# EAGLE board main (EAGLE 9.6.2)
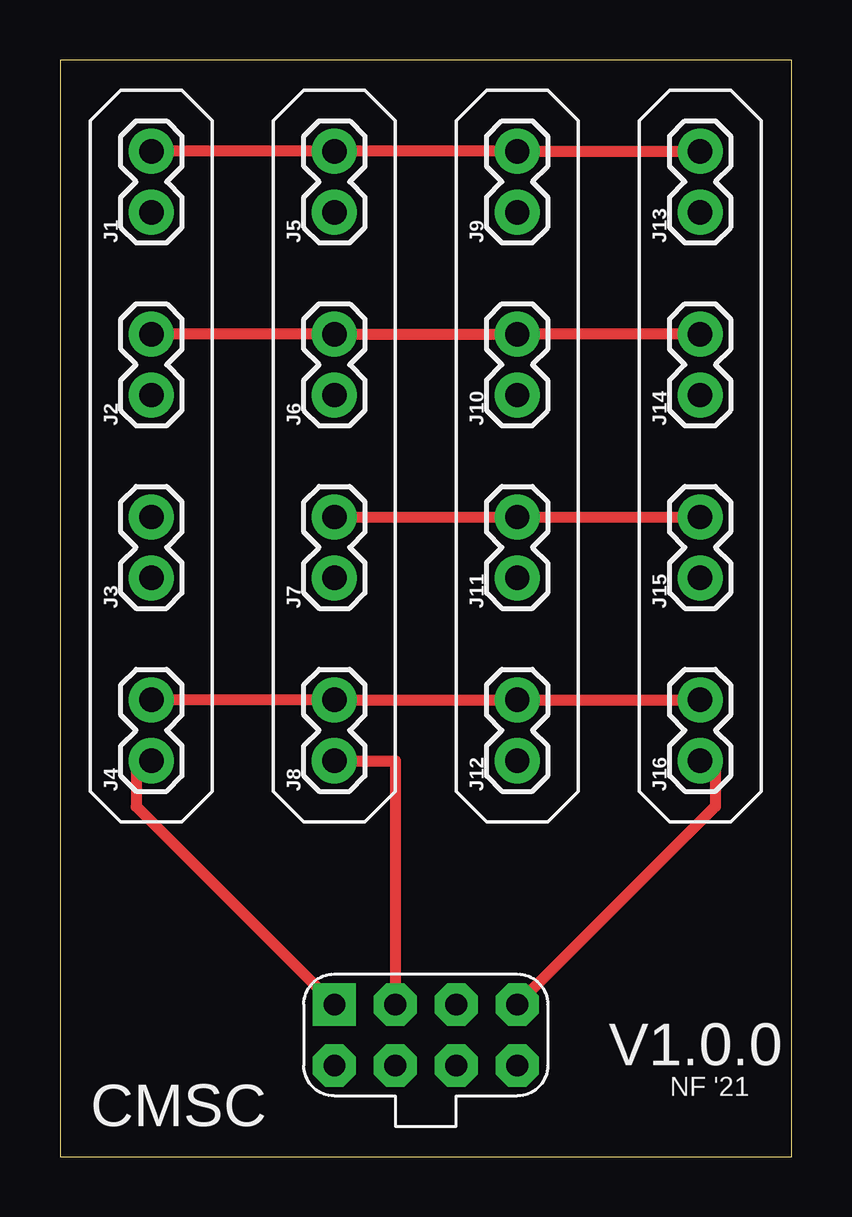
[diagram p0: board, top side]
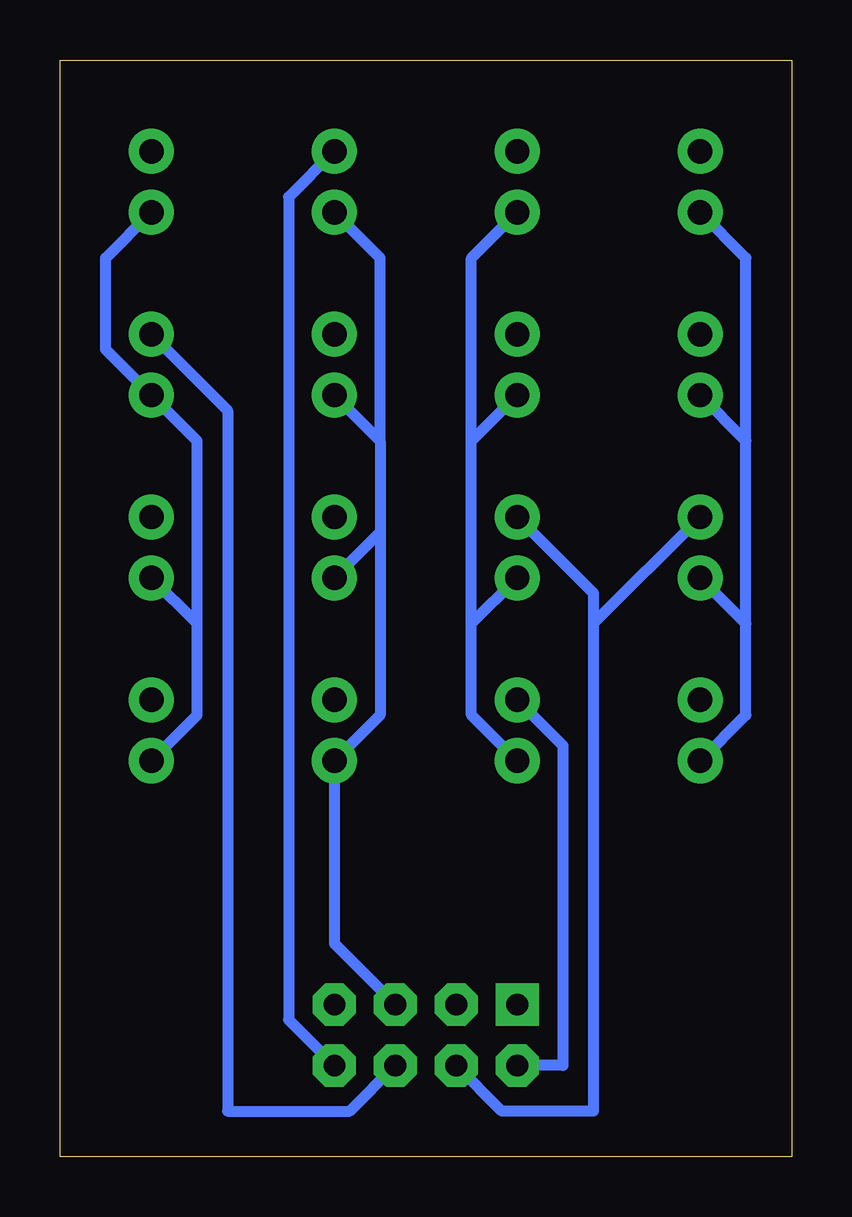
[diagram p1: board, bottom side, seen from below]

Size 30.48 x 45.72 mm. Coordinates in mm from the lower left corner, seen from the top.
Outline: 0,0 30.48,0 30.48,45.72 0,45.72 0,0
Copper layers (1*16): Top 0.035mm / dielectric 1.5mm / Bottom 0.035mm
Design rules "default *": minimum track width 18mil, minimum drill 0.35mm, track to track 18mil, track to pad 18mil, pad to pad 18mil, via to via 18mil, smd to smd 6mil, copper to edge 40mil, drill to drill 6mil, minimum pad ring 10mil, minimum via ring 8mil, stop-mask expansion 4mil, vias tented up to drill 0mil, thermal gap 10mil

## Footprints (pad centres in the part's own frame; a part is rotated, then mirrored left to right if it is on the bottom)
1X02 = drill 1.016 pad 1.88: 1 0,0; 2 2.54,0
BUTTON_GRID_HEADER_RIBBON_CONNECTOR = drill 0.9 pad 1.778 square: P1 -3.81,1.27 | drill 0.9 pad 1.778 octagon: P2 -1.27,1.27; P3 1.27,1.27; P4 3.81,1.27; PA -3.81,-1.27; PB -1.27,-1.27; PC 1.27,-1.27; PD 3.81,-1.27

## Placement (x,y rotation side)
J1  [1X02]  3.81,39.37 90 top
J2  [1X02]  3.81,31.75 90 top
J3  [1X02]  3.81,24.13 90 top
J4  [1X02]  3.81,16.51 90 top
J5  [1X02]  11.43,39.37 90 top
J6  [1X02]  11.43,31.75 90 top
J7  [1X02]  11.43,24.13 90 top
J8  [1X02]  11.43,16.51 90 top
J9  [1X02]  19.05,39.37 90 top
J10  [1X02]  19.05,31.75 90 top
J11  [1X02]  19.05,24.13 90 top
J12  [1X02]  19.05,16.51 90 top
J13  [1X02]  26.67,39.37 90 top
J14  [1X02]  26.67,31.75 90 top
J15  [1X02]  26.67,24.13 90 top
J16  [1X02]  26.67,16.51 90 top
U$1  BUTTON_GRID_HEADER  [BUTTON_GRID_HEADER_RIBBON_CONNECTOR]  15.24,5.08 0 top

## Library data of the parts
J1-J16 = Femtosat
U$1 = Subsystem Main

## Nets
N$1: J1.1 J2.1 J3.1 J4.1 U$1.P1
N$2: J5.1 J6.1 J7.1 J8.1 U$1.P2
N$3: J9.1 J10.1 J11.1 J12.1 U$1.P3
N$4: J13.1 J14.1 J15.1 J16.1 U$1.P4
PA: J4.2 J8.2 J12.2 J16.2 U$1.PA
PB: J3.2 J7.2 J11.2 J15.2 U$1.PB
PC: J2.2 J6.2 J10.2 J14.2 U$1.PC
PD: J1.2 J5.2 J9.2 J13.2 U$1.PD

## Tracks (layer width: path | path; a pad name or v marks a point on that pad's centre or on a via)
N$1
  Top 0.457: U$1.P1 3.17,14.61 3.17,16.51 J4.1
  Bottom 0.457: 1.91,22.23 J3.1 | 1.91,22.23 1.91,18.41 J4.1 | 1.91,29.84 J2.1 | 1.91,22.23 1.91,29.84 | J1.1 1.91,37.47 1.91,29.84
N$2
  Top 0.457: U$1.P2 13.97,16.51 J8.1
  Bottom 0.457: 13.34,22.23 J7.1 | 13.34,22.23 13.34,18.41 J8.1 | 13.34,29.84 J6.1 | 13.34,22.23 13.34,29.84 | J5.1 13.34,37.47 13.34,29.84
N$3
  Bottom 0.457: U$1.P3 19.05,8.89 J12.1 17.14,18.41 17.14,26.04 | 17.14,26.04 J11.1 | 17.14,29.84 17.14,26.04 | J10.1 17.14,29.84 | J9.1 17.14,37.47 17.14,29.84
N$4
  Top 0.457: U$1.P4 27.3,14.61 27.3,16.51 J16.1
  Bottom 0.457: 24.77,22.23 J15.1 | 24.77,22.23 24.77,18.41 J16.1 | 24.77,22.23 24.77,29.84 J14.1 28.57,33.66 28.57,37.47 J13.1
PA
  Top 0.457: J4.2 J8.2 J12.2 J16.2
  Bottom 0.457: U$1.PA 9.53,3.81 9.53,17.14 J8.2
PB
  Top 0.457: J7.2 J11.2 J15.2
  Bottom 0.457: U$1.PB 12.06,1.91 8.26,1.91 8.26,22.23 | 8.26,22.23 8.26,23.5 J7.2 | 8.26,22.23 J3.2
PC
  Top 0.457: J2.2 J6.2 J10.2 J14.2
  Bottom 0.457: U$1.PC 18.41,1.91 23.5,1.91 23.5,31.11 J14.2
PD
  Top 0.457: J1.2 J5.2 J9.2 J13.2
  Bottom 0.457: U$1.PD 20.95,5.71 20.95,40.01 J9.2

## Text on the board
tNames: V1.0.0 | NF '21 | CMSC